# EAGLE board Webasto (EAGLE 6.5.0)
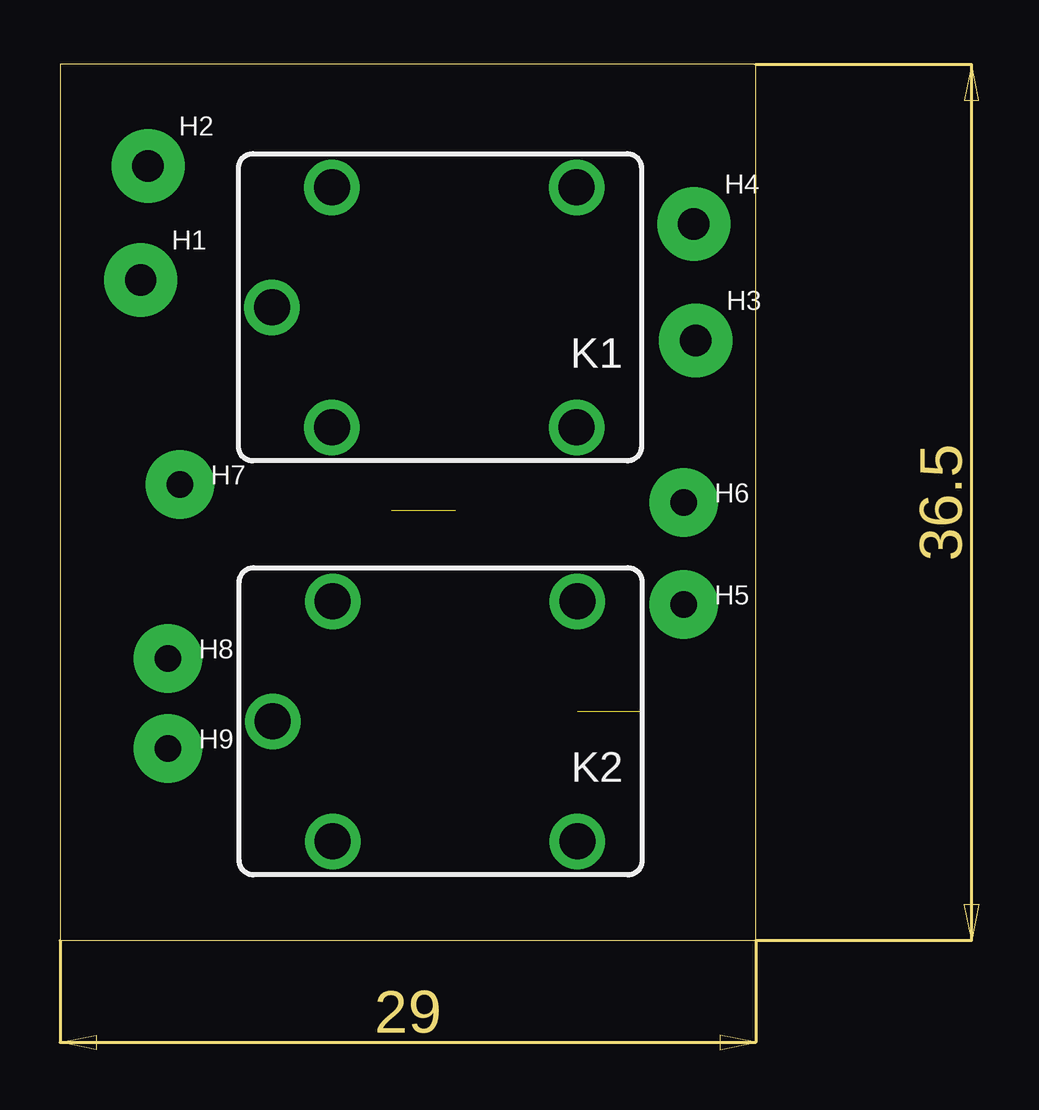
[diagram p0: board, top side]
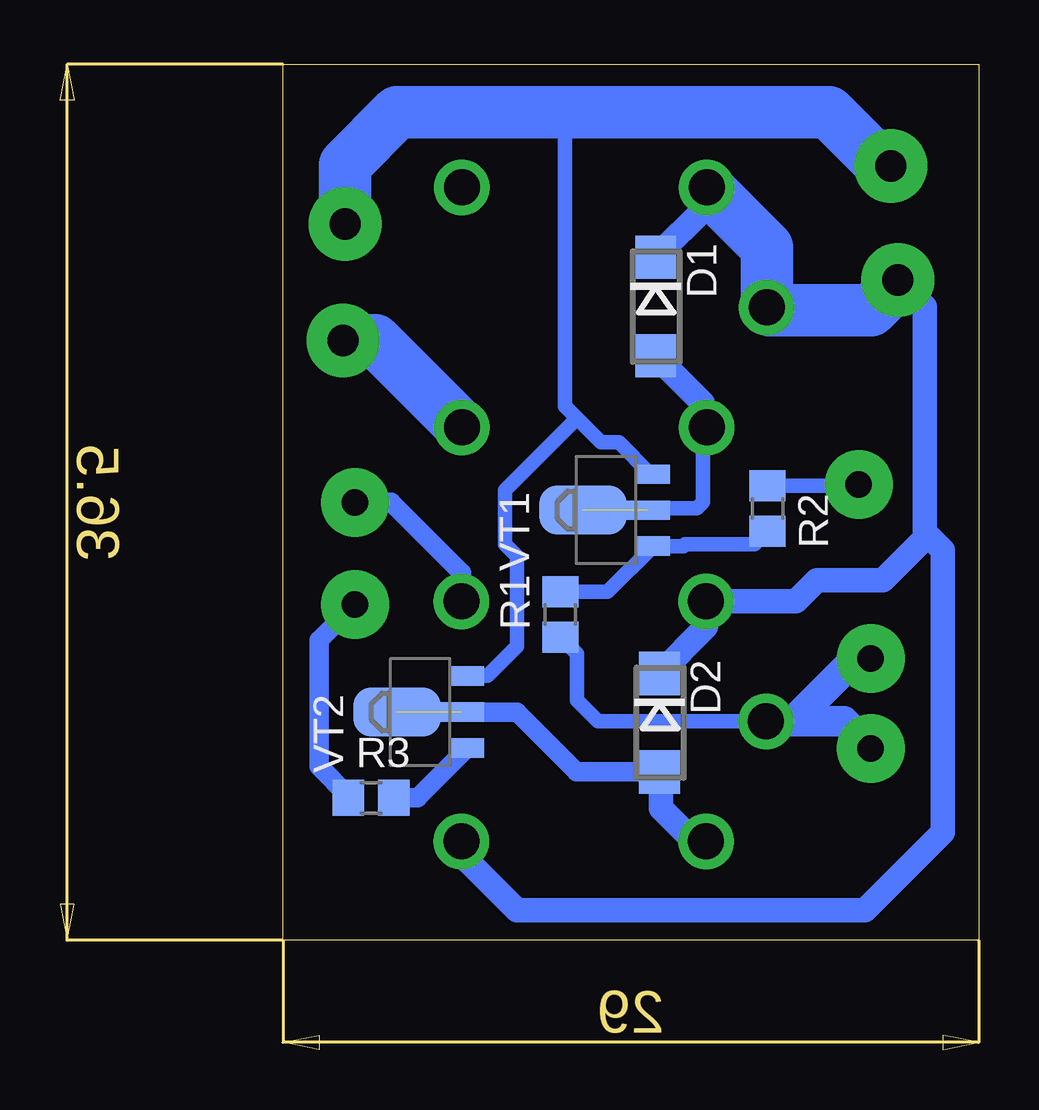
[diagram p1: board, bottom side, seen from below]

Size 29 x 36.5 mm. Coordinates in mm from the lower left corner, seen from the top.
Outline: 0,0 29,0 29,36.5 0,36.5 0,0
Copper layers (1*16): Top 0.035mm / dielectric 1.5mm / Bottom 0.035mm
Design rules "default": minimum track width 12mil, minimum drill 32mil, track to track 12mil, track to pad 12mil, pad to pad 12mil, via to via 12mil, smd to smd 8mil, copper to edge 40mil, drill to drill 8mil, minimum pad ring 16mil, minimum via ring 12mil, stop-mask expansion 4mil, vias tented up to drill 0mil, thermal gap 20mil

## Footprints (pad centres in the part's own frame; a part is rotated, then mirrored left to right if it is on the bottom)
DO214AC = smd 1.8 x 1.7: A 2.05,0; C -2.05,0
3,0 = drill 1.3 pad 3.048: P$1 0,0
2,8 = drill 1.1 pad 2.845: P$1 0,0
CQ1 = drill 1.5: 1 4.5,-5; 2 4.5,5; C 7,0; NC -5.7,-5; NO -5.7,5
R0805 = smd 1.3 x 1.5: 1 -0.95,0; 2 0.95,0
SOT89-BCE = smd 0.8 x 1.4: B -1.499,-1.981; E 1.499,-1.981 | smd 0.8 x 1.9: C 0,-1.727 | smd 2.032 x 3.65: C@1 0,0.94

## Placement (x,y rotation side)
D1  DIODESMD  [DO214AC]  13.47,26.41 270 bottom
D2  DIODESMD  [DO214AC]  13.31,9.07 270 bottom
H1  +12V  [3,0]  3.37,27.52 0 top
H2  GND  [3,0]  3.67,32.27 0 top
H3  Pump 12V  [3,0]  26.5,25 0 top
H4  Pump GND  [3,0]  26.42,29.85 0 top
H5  Timer  [2,8]  26,14 0 top
H6  Generator  [2,8]  26,18.25 0 top
H7  Web. FAN  [2,8]  5,19 0 top
H8  Web. CANTROL  [2,8]  4.5,11.75 0 top
H9  Cab. FAN  [2,8]  4.5,8 0 top
K1  CQ1-12V  [CQ1]  15.84,26.38 180 top
K2  CQ1-12V  [CQ1]  15.87,9.13 180 top
R1  10k  [R0805]  17.44,13.58 90 bottom
R2  10k  [R0805]  8.81,18 270 bottom
R3  10k  [R0805]  25.33,5.94 0 bottom
VT1  BCX56-16  [SOT89-BCE]  15.55,17.93 90 bottom
VT2  BCX56-16  [SOT89-BCE]  23.3,9.52 90 bottom

## Library data of the parts
D1 D2 VT1 VT2 = usb
H1-H9 = holes
K1 K2 = relay; OC_FARNELL: unknown; OC_NEWARK: unknown
R1-R3 = rcl

## Nets
+12V: D1.C D2.C H1.P$1 K1.1 K1.C K2.1 K2.NO
GND: H2.P$1 H4.P$1 VT1.E VT2.E
N$1: H7.P$1 R2.1
N$2: D1.A K1.2 VT1.C VT1.C@1
N$3: R1.2 R2.2 VT1.B
N$4: D2.A K2.2 VT2.C VT2.C@1
N$5: R3.2 VT2.B
N$6: H8.P$1 H9.P$1 K2.C R1.1
N$8: H5.P$1 R3.1
N$9: H3.P$1 K1.NO
N$10: H6.P$1 K2.NC

## Tracks (layer width: path | path; a pad name or v marks a point on that pad's centre or on a via)
+12V
  Bottom 1.016: K1.1 11.34,30.59 D1.C | D2.C 11.37,13.06 K2.1 7.62,14.13 6.75,15 4,15 2.25,16.75 2.25,17 | 2.25,17 2.25,26.4 H1.P$1 | K2.NO 21.57,3.57 19.25,1.25 4.75,1.25 1.5,4.5 1.5,16.25 2.25,17
  Bottom 2.184: H1.P$1 3.37,27.38 4.5,26.25 8.71,26.25 K1.C 8.84,28.88 K1.1
GND
  Bottom 0.61: 18.43,34.32 18.25,34.5 | 17.25,34.5 17.25,22.25 16.75,21.75 | VT1.E 13.68,19.43 15,20.75 15.75,20.75 16.75,21.75 | 16.75,21.75 19.75,18.75 19.75,16.5 19.25,16 19.25,12.25 20.48,11.02 VT2.E
  Bottom 2.184: H2.P$1 4.02,32.27 6.25,34.5 17.25,34.5 18.25,34.5 24.25,34.5 26.42,32.33 H4.P$1
N$1
  Bottom 0.61: R2.1 5.05,18.95 H7.P$1
N$2  (1 unrouted)
  Bottom 0.61: 11.5,21.22 11.5,18.25 11.75,18 13.75,18 VT1.C | K1.2 11.37,21.38 11.5,21.25
  Bottom 1.016: 11.5,21.22 11.5,21.25 11.5,22.39 D1.A
N$3
  Bottom 0.61: R1.2 15.47,14.53 VT1.B 12.32,16.43 12.25,16.5 9.36,16.5 R2.2
N$4  (1 unrouted)
  Bottom 0.813: D2.A 16.77,7.02 19.25,9.5 21.55,9.5 VT2.C
  Bottom 1.016: K2.2 11.88,4.13 13.25,5.5 13.25,6.96 D2.A
N$5
  Bottom 0.813: R3.2 23.4,5.94 VT2.B
N$6
  Bottom 0.61: K2.C 15.88,9.13 16.75,10 16.75,11.94 R1.1
  Bottom 1.27: K2.C 7.75,9.13 | 7.75,9.13 5.63,9.13 H9.P$1 | H8.P$1 5.13,11.75 7.75,9.13
N$8
  Bottom 0.813: R3.1 26.28,6.03 27.5,7.25 27.5,12.5 H5.P$1
N$9
  Bottom 2.184: H3.P$1 25.16,25 K1.NO
N$10
  Bottom 0.813: K2.NC 21.57,15.32 24.5,18.25 H6.P$1